# Altium PCB SwitchPlate.PcbDoc
Units mil, origin at the board's own origin, x right, y up, seen from the top; angles counter-clockwise.
Board outline 5470 x 4386.98 mil, 2 copper layers (Top Layer, Bottom Layer), stack 39.4 mil thick; 35 components, 63 nets, 35 pads, 0 vias.
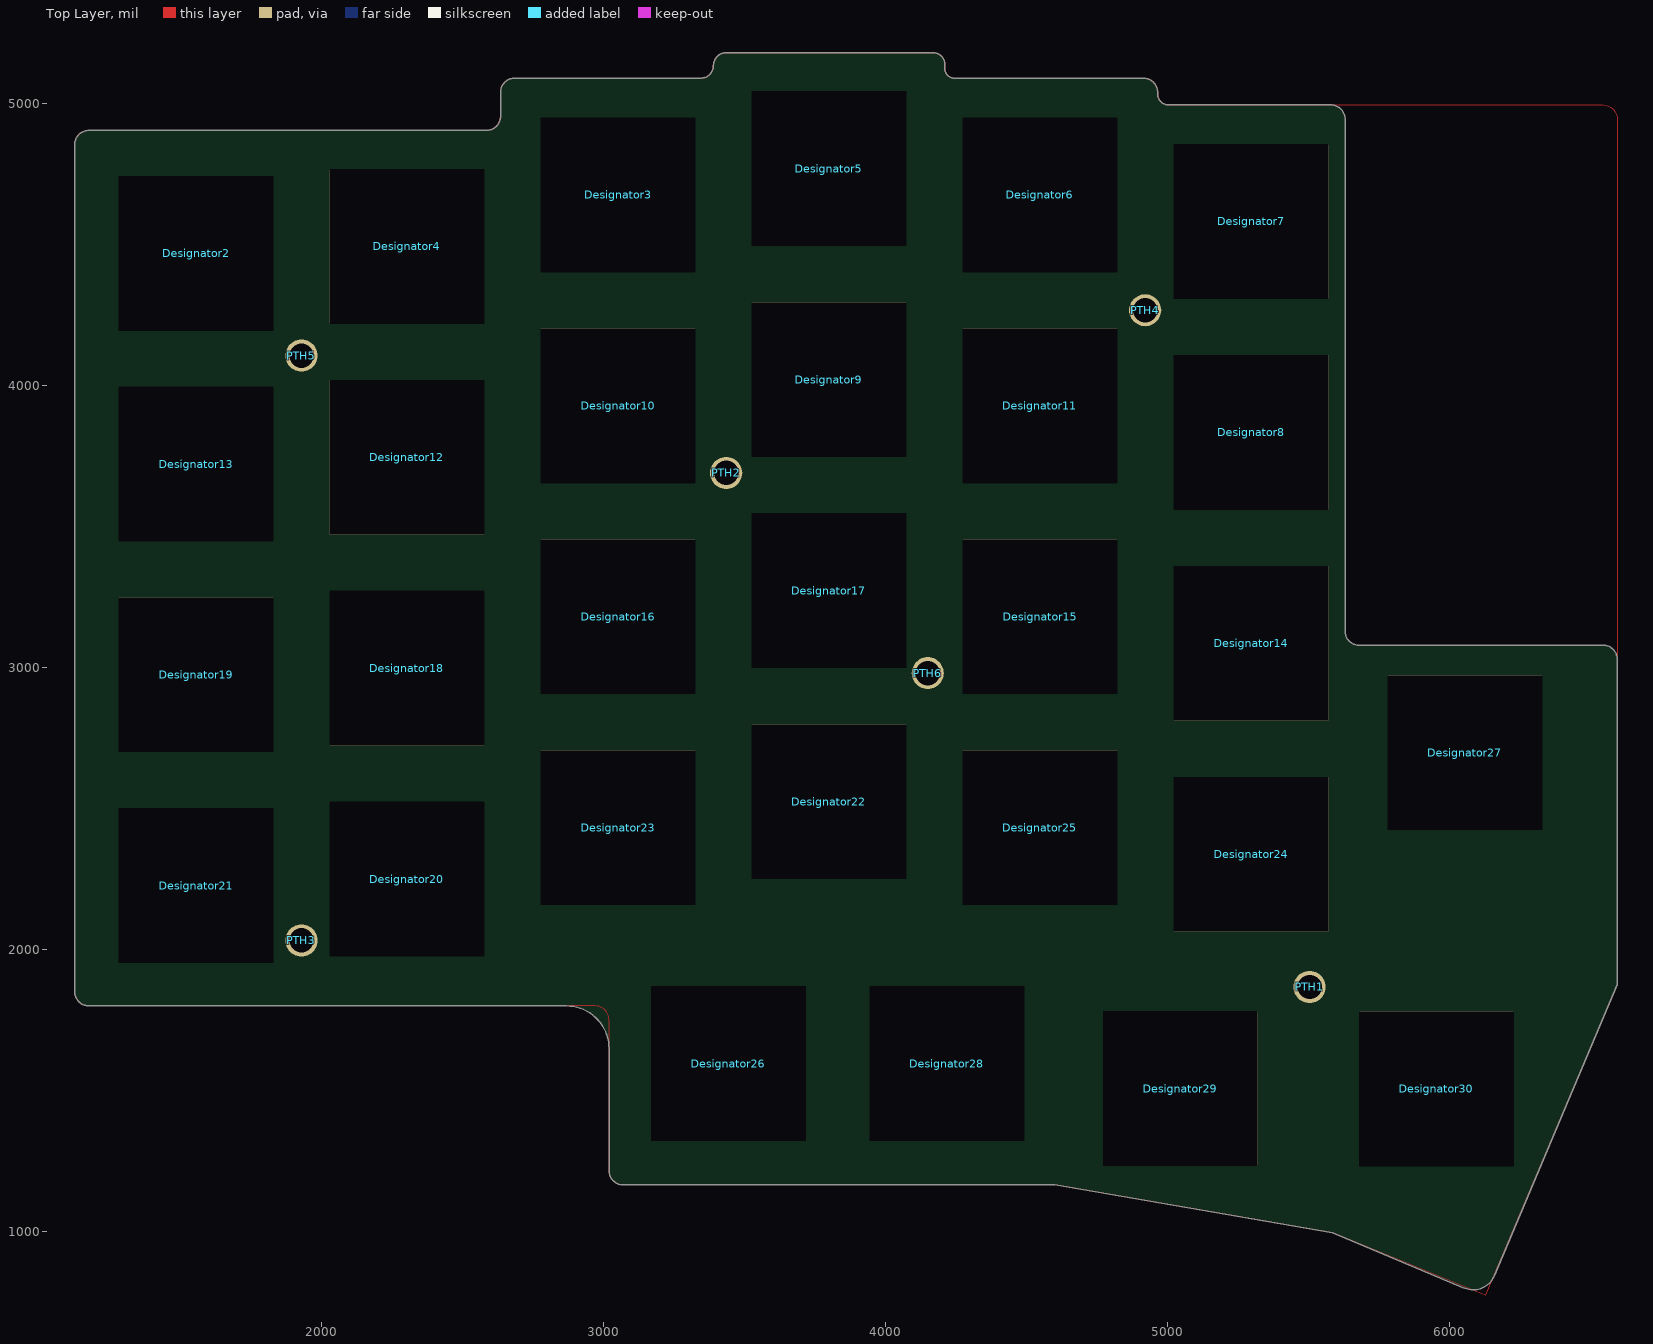
[diagram p0: Top Layer view]
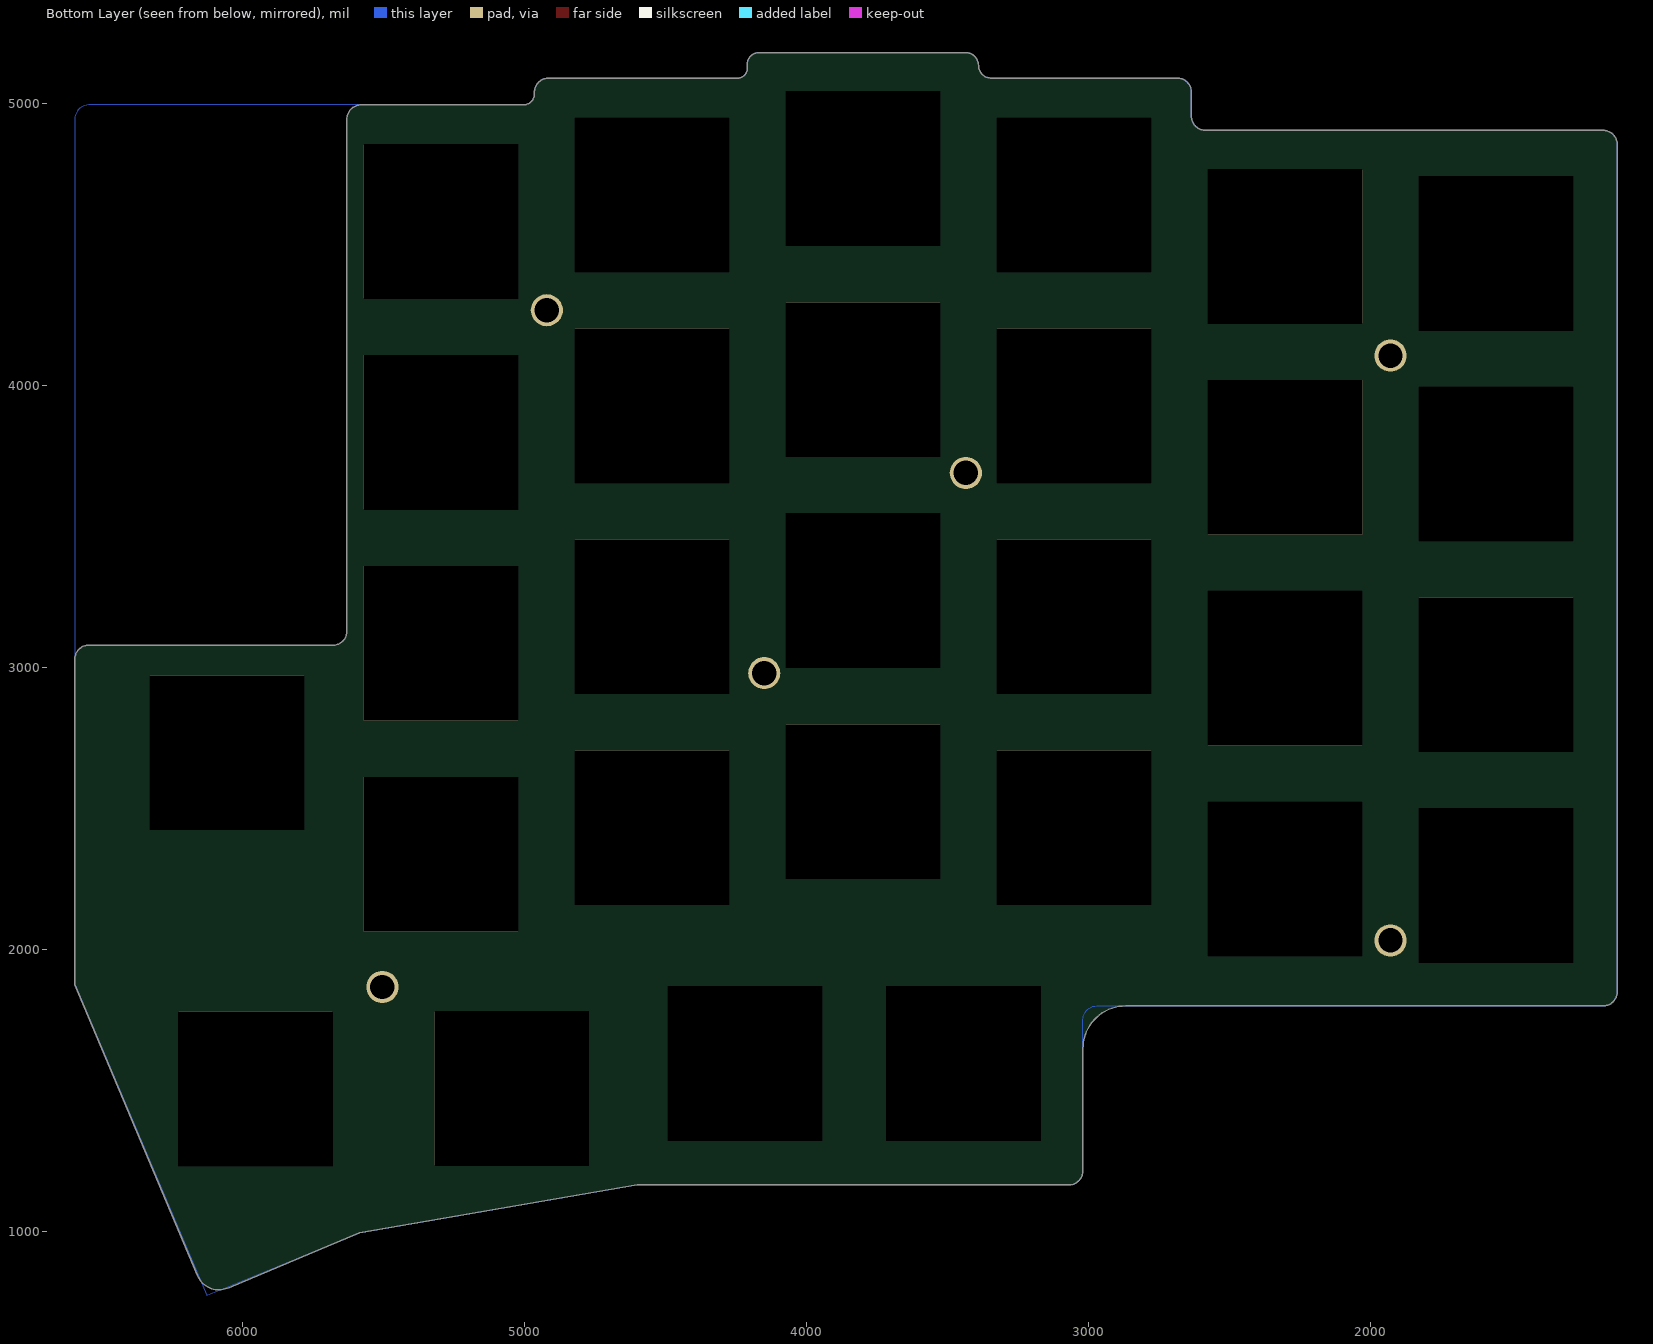
[diagram p1: Bottom Layer view, seen from below]

## Layer stack, top to bottom
Top Solder: solder mask 0.4, Solder Resist, Dk 3.5
Top Layer: signal copper 1.4
Dielectric 1: dielectric 36.6, FR-4, Dk 4.4
Bottom Layer: signal copper 1.4
Bottom Solder: solder mask 0.4, Solder Resist, Dk 3.5

## Board outline
1125,1850 1125,4855 cw(c1175,4855) 1175,4905 2585,4905 ccw(c2585,4955) 2635,4955 2635,5040 cw(c2685,5040) 2685,5090 3345,5090 ccw(c3345,5135) 3390,5135 cw(c3435,5135) 3435,5180 4170,5180 cw(c4170,5140) 4210,5140 4210,5125 ccw(c4245,5125) 4245,5090 4915,5090 cw(c4915,5040) 4965,5040 4965,5035 ccw(c5005,5035) 5005,4995 5580,4995 cw(c5580,4945) 5630,4945 5630,3129 ccw(c5680,3129) 5680,3079 6545,3079 cw(c6545,3029) 6595,3029 6595,1876.24 6160.46,845.21 cw(c6084,875.08) 6048.51,801.07 5585,995 4600,1165 3070,1165 cw(c3070,1215) 3020,1215 3020,1647.95 ccw(c2867.95,1647.95) 2867.95,1800 1175,1800 cw(c1175,1850)

## Design rules (kind name [scope] priority, off if disabled: settings)
BoardOutlineClearance [All] p1: gap=7.87 ignorepadtopadclearanceinfootprint=FALSE
Clearance [All] p1: gap=5 ignorepadtopadclearanceinfootprint=TRUE except(10: Arc-Hole Track-Hole SMDPad-Hole THPad-Hole Via-Hole Fill-Hole Poly-Hole Region-Hole Text-Hole)
ComponentClearance [All] p1: gap=5 collisioncheckmode=3 verticalgap=5 showdistances=TRUE
DiffPairsRouting [All] p1: maxlimit=100 minlimit=5 mostfreqgap=9.37 toplayer_minwidth=5 toplayer_maxwidth=100 toplayer_prefwidth=31.57 bottomlayer_minwidth=5 bottomlayer_maxwidth=100 bottomlayer_prefwidth=31.57 impedanceprofiledriven=TRUE impedanceprofileid={D4E62B93-00E1-4489-9EE8-131CB804B821} impedanceprofilevalue=90.000000 maxuncoupledlength=500
Height [All] p1: minheight=0 maxheight=71497.94 prefheight=500
HoleSize [All] p1: absolutevalues=TRUE maxlimit=248.03 minlimit=11.81 maxpercent=80.000 minpercent=20.000
HoleToHoleClearance [All] p1: gap=10 allowstackedmicrovias=FALSE
MinimumAnnularRing [All] p1: minimumring=6
MinimumSolderMaskSliver [All] p1: minsoldermaskwidth=6
PlaneClearance [All] p1: clearance=5
PlaneConnect PlaneConnectPowerPads [InPadClass('PowerPads')] p1: planeconnectstyle=Direct reliefexpansion=20 reliefentries=4 reliefconductorwidth=10 reliefairgap=10
PlaneConnect [All] p2: pad.planeconnectstyle=Relief pad.reliefexpansion=11.81 pad.reliefentries=4 pad.reliefconductorwidth=5 pad.reliefairgap=5 via.planeconnectstyle=Direct via.reliefexpansion=11.81 via.reliefentries=4 via.reliefconductorwidth=5 via.reliefairgap=5
PolygonConnect PolygonConnectPowerPads [All vs (InPadClass('PowerPads'))] p1: connectstyle=Direct reliefconductorwidth=10 reliefentries=4 polygonreliefangle="90 Angle" airgapwidth=10
PolygonConnect [All] p2: thpad.connectstyle=Relief thpad.reliefconductorwidth=5 thpad.reliefentries=4 thpad.polygonreliefangle="90 Angle" thpad.airgapwidth=5 smdpad.connectstyle=Relief smdpad.reliefconductorwidth=5 smdpad.reliefentries=4 smdpad.polygonreliefangle="90 Angle" smdpad.airgapwidth=5 via.connectstyle=Direct via.reliefconductorwidth=5 via.reliefentries=4 via.polygonreliefangle="90 Angle" via.airgapwidth=5
RoutingVias [All] p1: holewidth=11.81 width=23.62 viastyle="Through Hole" minholewidth=11.81 minwidth=23.62 maxholewidth=23.62 maxwidth=259.84
SilkToSilkClearance [All] p1: silktosilkclearance=5
SilkToSolderMaskClearance [IsPad] p1: minsilkscreentomaskgap=5 clearancetoexposedcopper=TRUE
SolderMaskExpansion [All] p1: expansion=2 istentingtop=FALSE
SupplyNets "Schematic Supply Nets_3" [InNet('+5V')] p1: voltage=0.000
SupplyNets "Schematic Supply Nets_2" [InNet('GND')] p2: voltage=0.000
SupplyNets "Schematic Supply Nets_1" [InNet('+3.3V')] p3: voltage=0.000
SupplyNets "Schematic Supply Nets" [InNet('+1.1V')] p4: voltage=0.000
UnRoutedNet [All] p1: checkbadconnections=TRUE
Width Width_10mil [All] p1: maxlimit=1000 minlimit=8 preferedwidth=10 minimp=50.000000 maximp=50.000000 favimp=50.000000
Width Width_6mil [All] p2: maxlimit=1000 minlimit=6 preferedwidth=6 minimp=50.000000 maximp=50.000000 favimp=50.000000
Width Power_20mil [All] p3: maxlimit=1000 minlimit=20 preferedwidth=20 minimp=50.000000 maximp=50.000000 favimp=50.000000
Width Power_12mil [All] p4: maxlimit=1000 minlimit=12 preferedwidth=12 minimp=50.000000 maximp=50.000000 favimp=50.000000
Width Width_5mil [All] p5: maxlimit=1000 minlimit=5 preferedwidth=5 minimp=50.000000 maximp=50.000000 favimp=50.000000
Width [All] p6: maxlimit=100 minlimit=5 preferedwidth=10 minimp=50.000000 maximp=50.000000 favimp=50.000000
19 further rules are at their usual default settings.

## Classes and differential pairs
differential pair class USB: USB_D
component class Switches: PTH1 PTH2 PTH3 PTH4 PTH5 PTH6
differential pair USB_D: +USB_D_P -USB_D_N

## Components (designator, comment, footprint, x,y, rotation, side; value= is the part's Value field where it differs from the comment)
Designator2 "Comment" SWITCH_HOLE 1555.12,4468.5 r0 top
Designator3 "Comment" SWITCH_HOLE 3051.55,4675.69 r0 top
Designator4 "Comment" SWITCH_HOLE 2302.83,4493.19 r0 top
Designator5 "Comment" SWITCH_HOLE 3799.65,4769.44 r0 top
Designator6 "Comment" SWITCH_HOLE 4547.98,4675.69 r0 top
Designator7 "Comment" SWITCH_HOLE 5296.7,4581.94 r0 top
Designator8 "Comment" SWITCH_HOLE 5296.7,3833.72 r0 top
Designator9 "Comment" SWITCH_HOLE 3799.65,4020.39 r0 top
Designator10 "Comment" SWITCH_HOLE 3051.55,3927.72 r0 top
Designator11 "Comment" SWITCH_HOLE 4547.98,3927.72 r0 top
Designator12 "Comment" SWITCH_HOLE 2302.83,3745.39 r0 top
Designator13 "Comment" SWITCH_HOLE 1555.12,3721.5 r0 top
Designator14 "Comment" SWITCH_HOLE 5296.7,3085.72 r0 top
Designator15 "Comment" SWITCH_HOLE 4547.98,3179.72 r0 top
Designator16 "Comment" SWITCH_HOLE 3051.55,3179.72 r0 top
Designator17 "Comment" SWITCH_HOLE 3799.65,3272.72 r0 top
Designator18 "Comment" SWITCH_HOLE 2303,2997.72 r0 top
Designator19 "Comment" SWITCH_HOLE 1555.12,2974.31 r0 top
Designator20 "Comment" SWITCH_HOLE 2303,2249.72 r0 top
Designator21 "Comment" SWITCH_HOLE 1555.12,2226.39 r0 top
Designator22 "Comment" SWITCH_HOLE 3799.65,2523.72 r0 top
Designator23 "Comment" SWITCH_HOLE 3051.55,2431.72 r0 top
Designator24 "Comment" SWITCH_HOLE 5296.7,2337.72 r0 top
Designator25 "Comment" SWITCH_HOLE 4547.98,2431.69 r0 top
Designator26 "Comment" SWITCH_HOLE 3443.15,1595.39 r0 top
Designator27 "Comment" SWITCH_HOLE 6055,2697.72 r0 top
Designator28 "Comment" SWITCH_HOLE 4218.15,1595.39 r0 top
Designator29 "Comment" SWITCH_HOLE 5045.16,1506.85 r0 top
Designator30 "Comment" SWITCH_HOLE 5953.81,1505.65 r0 top
PTH1 "M2_Mount" Mounting_Holes#1 5504,1867 r90 top
PTH2 "M2_Mount" Mounting_Holes#1 3435,3690 r90 top
PTH3 "M2_Mount" Mounting_Holes#2 1889,2032 r90 top
PTH4 "M2_Mount" Mounting_Holes#1 4921,4267 r90 top
PTH5 "M2_Mount" Mounting_Holes#1 1929,4106 r90 top
PTH6 "M2_Mount" Mounting_Holes#1 4150,2980 r90 top

## Footprints (in the part's own frame and the unit in brackets; to place one, negate y for a bottom-side part, rotate by r counter-clockwise, add the part's x,y. Pads: shape width x height; smd on the part's side, far side on the other; paste and mask are expansions set on the pad)
Mounting_Holes#1 [mm]
  round 2.9 hole 2.2: 1(0,0)
Mounting_Holes#2 [mm]
  round 2.9 hole 2.2: 1(0,-1.016)
SWITCH_HOLE [mm]
  rect 13.9x13.9 hole 13.9 square unplated: SW_MOUNT(0,0)

## Nets (pads, with @x,y where several pads share a name; then routed paths per layer and width w, separated by ;. In a path a pad name is that pad's centre, name@x,y a point inside that pad or via, vN(x,y) a via of type N, cw(c..) or ccw(c..) an arc to the next point about the centre after c; other vN are vias at no path point)
+1.1V: 
+3.3V: 
+5V: 
GND: 
NetC15_2: 
NetD1_1: 
NetD1_2: 
NetD2_1: 
NetD2_2: 
NetD3_1: 
NetD3_2: 
NetD4_1: 
NetD4_2: 
NetD5_1: 
NetD5_2: 
NetD6_2: 
NetD7_2: 
NetD8_2: 
NetD9_2: 
NetD10_2: 
NetD11_2: 
NetD12_2: 
NetD13_2: 
NetD14_2: 
NetD15_2: 
NetD16_2: 
NetD17_2: 
NetD18_2: 
NetD19_2: 
NetD20_2: 
NetD21_2: 
NetD22_1: 
NetD22_2: 
NetD23_2: 
NetD24_2: 
NetD25_2: 
NetD26_2: 
NetD27_2: 
NetD28_2: 
NetD29_2: 
NetJ1_A5: 
NetJ1_B5: 
NetR1_1: 
NetR2_1: 
NetR4_1: 
NetS1_2: 
NetS6_2: 
NetS11_2: 
NetS16_2: 
NetS21_2: 
QSPI_SCLK: 
QSPI_SD0: 
QSPI_SD1: 
QSPI_SD2: 
QSPI_SD3: 
QSPI_SS: 
RUN: 
SPLIT_DATA_A: 
SPLIT_DATA_B: 
USB_D_N: 
USB_D_P: 
XIN: 
XOUT: 
pads on no net: Designator2.SW_MOUNT Designator3.SW_MOUNT Designator4.SW_MOUNT Designator5.SW_MOUNT Designator6.SW_MOUNT Designator7.SW_MOUNT Designator8.SW_MOUNT Designator9.SW_MOUNT Designator10.SW_MOUNT Designator11.SW_MOUNT Designator12.SW_MOUNT Designator13.SW_MOUNT Designator14.SW_MOUNT Designator15.SW_MOUNT Designator16.SW_MOUNT Designator17.SW_MOUNT Designator18.SW_MOUNT Designator19.SW_MOUNT Designator20.SW_MOUNT Designator21.SW_MOUNT Designator22.SW_MOUNT Designator23.SW_MOUNT Designator24.SW_MOUNT Designator25.SW_MOUNT Designator26.SW_MOUNT Designator27.SW_MOUNT Designator28.SW_MOUNT Designator29.SW_MOUNT Designator30.SW_MOUNT PTH1.1 PTH2.1 PTH3.1 PTH4.1 PTH5.1 PTH6.1

## Polygon pours and split planes (outlines as drawn)
GND on Bottom Layer "NONET_L02_P003" (solid, shelved, pour order 3): 1175,1800 cw(c1175,1850) 1125,1850 1125,4855 cw(c1175,4855) 1175,4905 2585,4905 ccw(c2585,4955) 2635,4955 2635,5040 cw(c2685,5040) 2685,5090 3345,5090 ccw(c3345,5135) 3390,5135 cw(c3435,5135) 3435,5180 4170,5180 cw(c4170,5140) 4210,5140 4210,5125 ccw(c4245,5125) 4245,5090 4915,5090 cw(c4915,5040) 4965,5040 4965,5035 ccw(c5005,5035) 5005,4995 6545,4995 cw(c6545,4945) 6595,4945 6595,1876.24 6127.58,773.91 5585,995 4600,1165 3070,1165 cw(c3070,1215) 3020,1215 3020,1750 ccw(c2970,1750) 2970,1800
+3.3V on Top Layer "NONET_L01_P004" (solid, shelved, pour order 4): 1175,1800 cw(c1175,1850) 1125,1850 1125,4855 cw(c1175,4855) 1175,4905 2585,4905 ccw(c2585,4955) 2635,4955 2635,5040 cw(c2685,5040) 2685,5090 3345,5090 ccw(c3345,5135) 3390,5135 cw(c3435,5135) 3435,5180 4170,5180 cw(c4170,5140) 4210,5140 4210,5125 ccw(c4245,5125) 4245,5090 4915,5090 cw(c4915,5040) 4965,5040 4965,5035 ccw(c5005,5035) 5005,4995 6545,4995 cw(c6545,4945) 6595,4945 6595,1876.24 6127.58,773.91 5585,995 4600,1165 3070,1165 cw(c3070,1215) 3020,1215 3020,1750 ccw(c2970,1750) 2970,1800

## Silkscreen, mask and mechanical layers (free items; w line width, h text height)
Mechanical 1:
  lines w10: 1125,1850 ccw(c1175,1850) 1175,1800 2867.95,1800 cw(c2867.95,1647.95) 3020,1647.95 3020,1215 ccw(c3070,1215) 3070,1165 4600,1165 5585,995 6048.51,801.07 ccw(c6084,875.08) 6160.46,845.21 6595,1876.24 6595,1940 6595,1955 6595,2000 6595,2030 6595,3029 ccw(c6545,3029) 6545,3079 5680,3079 cw(c5680,3129) 5630,3129 5630,4945 ccw(c5580,4945) 5580,4995 5005,4995 cw(c5005,5035) 4965,5035 4965,5040 ccw(c4915,5040) 4915,5090 4245,5090 cw(c4245,5125) 4210,5125 4210,5140 ccw(c4170,5140) 4170,5180 3435,5180 ccw(c3435,5135) 3390,5135 cw(c3345,5135) 3345,5090 2685,5090 ccw(c2685,5040) 2635,5040 2635,4955 cw(c2585,4955) 2585,4905 1925,4905 1175,4905 ccw(c1175,4855) 1125,4855 1125,1850